# Altium PCB pay-ssm.PcbDoc (part 3 of 3)
Units mm, origin at the board's own origin, x right, y up, seen from the top; angles counter-clockwise.
Board outline 128 x 54 mm, 4 copper layers (Top Layer, GND, VCC, Bottom Layer), stack 0.778 mm thick; 199 components, 184 nets, 851 pads, 416 vias.
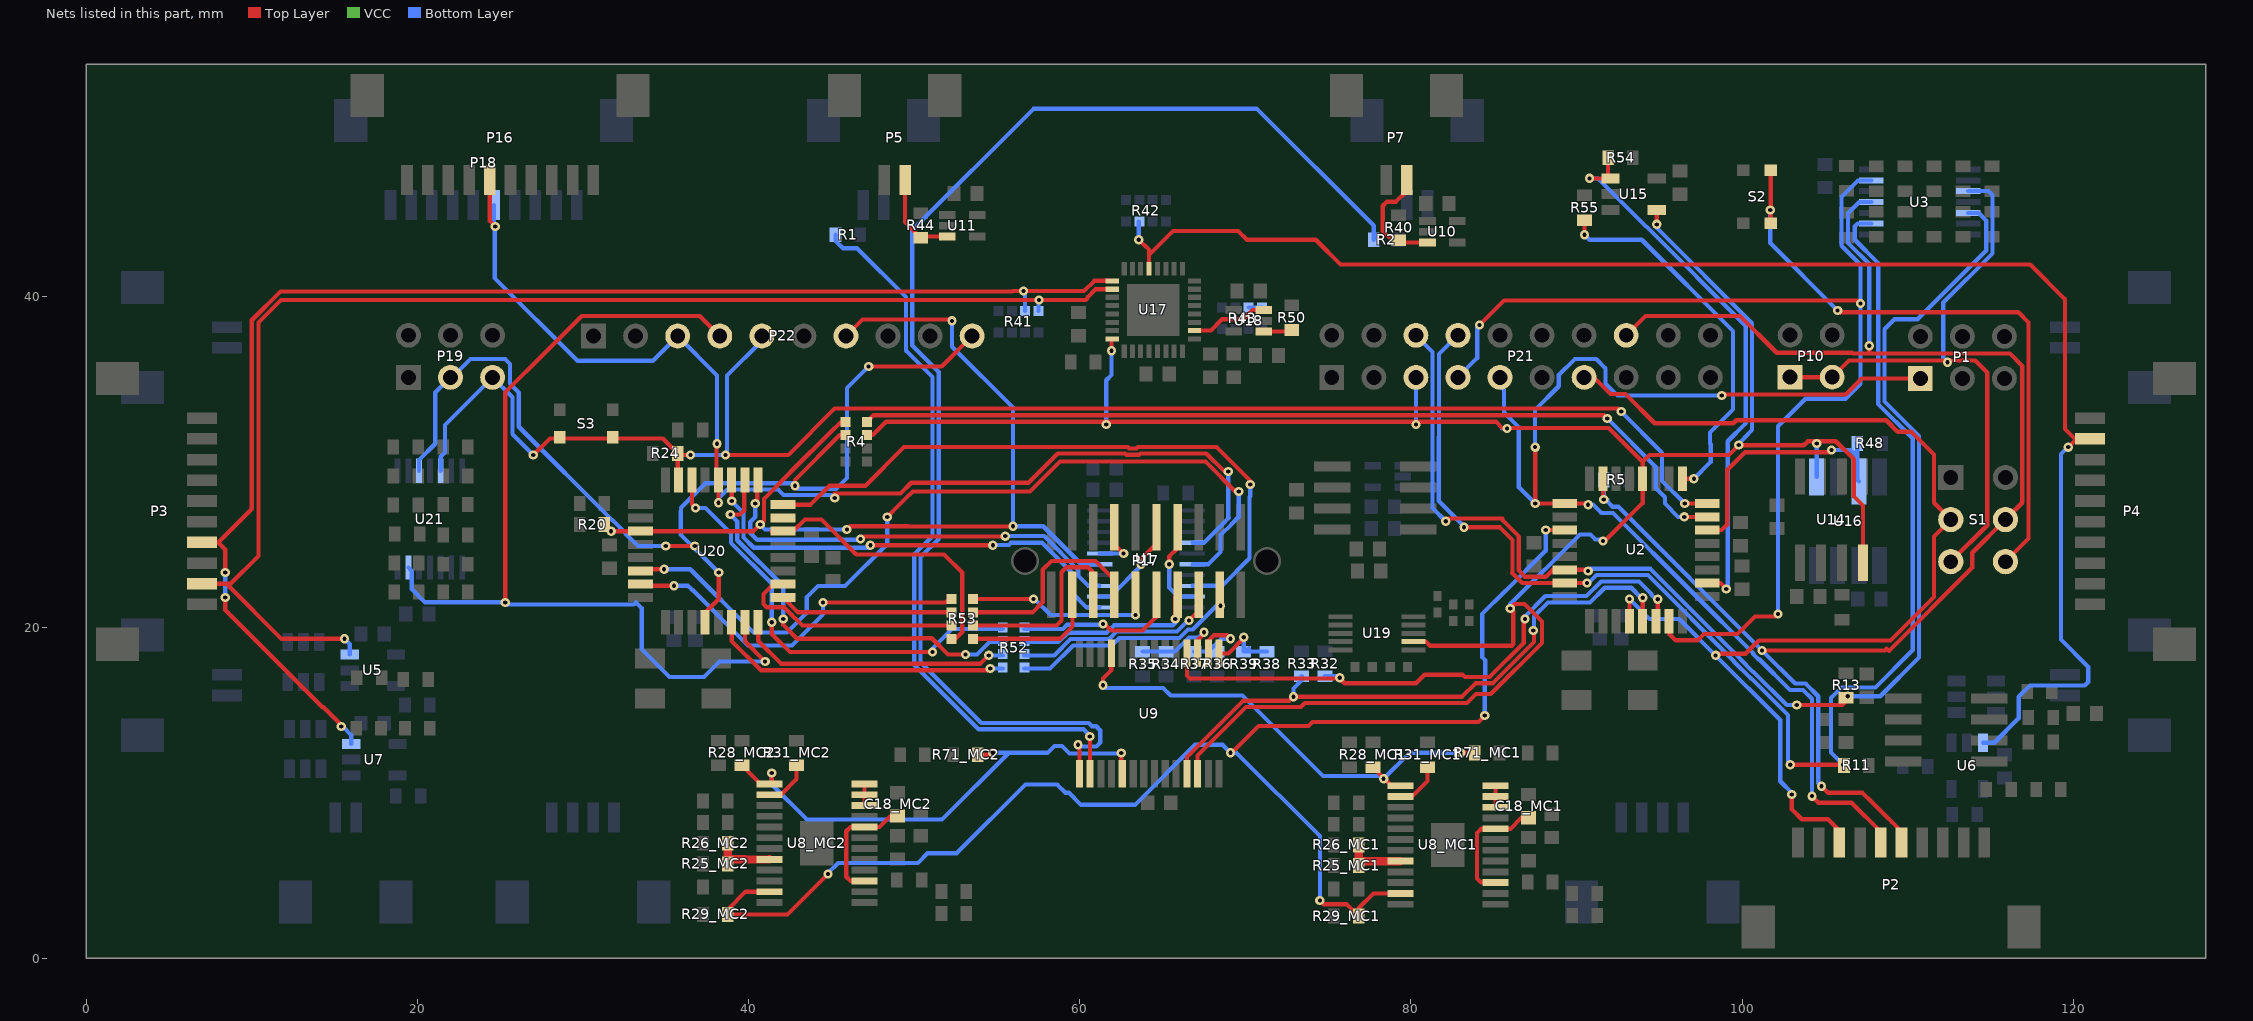
[diagram p5: the nets of this part, all layers, seen from the top]

## Via types
v1: diameter 0.559, hole 0.254, Top Layer to Bottom Layer, 376 vias
v2: diameter 1.5, hole 1.1, Top Layer to Bottom Layer, 32 vias
v3: diameter 6, hole 3.6, Top Layer to Bottom Layer, 8 vias

## Nets (pads, with @x,y where several pads share a name; then routed paths per layer and width w, separated by ;. In a path a pad name is that pad's centre, name@x,y a point inside that pad or via, vN(x,y) a via of type N, cw(c..) or ccw(c..) an arc to the next point about the centre after c; other vN are vias at no path point) (continued)
NetR25_MC1_2: R25_MC1.2 R26_MC1.2 U8_MC1.8 | length 4.5
  Top Layer w0.5: R26_MC1.2@76.85,6.85 76.847,6.825 R25_MC1.2@76.847,5.875 ; R25_MC1.2@76.847,5.875 76.85,5.875 77.894,5.875 ; R25_MC1.2@76.847,5.875 77.894,5.875 ; 77.894,5.875 77.9,5.869 U8_MC1.8@79.351,5.869 ; U8_MC1.8@79.351,5.869 U8_MC1.8@79.357,5.875 U8_MC1.8@79.351,5.869
NetR25_MC2_2: R25_MC2.2 R26_MC2.2 U8_MC2.8 | length 4.5
  Top Layer w0.5: R26_MC2.2@38.75,6.956 38.747,6.931 R25_MC2.2@38.747,5.981 ; U8_MC2.8@41.257,5.981 41.251,5.975 39.8,5.975 39.794,5.981 ; R25_MC2.2@38.747,5.981 38.75,5.981 39.794,5.981 ; R25_MC2.2@38.747,5.981 39.794,5.981
NetR31_MC1_2: R31_MC1.2 U8_MC1.2 | length 2.9
  Top Layer w0.254: U8_MC1.2@79.357,9.775 80.056,9.775 81,10.719 R31_MC1.2@81,11.55
NetR31_MC2_2: R31_MC2.2 U8_MC2.2 | length 2.9
  Top Layer w0.254: U8_MC2.2@41.257,9.881 41.956,9.881 42.9,10.825 R31_MC2.2@42.9,11.656
NetR34_2: R34.2 R35.2 U9.17 | length 5.6
  Top Layer w0.254: U9.17@67.114,18.418 67.114,19.214 67.5,19.6 v1(67.5,19.7)
  Bottom Layer w0.254: R35.2@63.8,18.525 R34.2@65.2,18.525 65.741,18.525 66.601,19.386 67.185,19.386 v1(67.5,19.7)
NetR36_2: R36.2 R37.2 U9.16 | length 4.9
  Top Layer w0.254: U9.16@67.774,18.418 67.774,19.184 68.106,19.515 68.885,19.515 v1(69.1,19.3)
  Bottom Layer w0.254: R37.2@66.9,18.525 67.8,18.525 67.774,18.551 68.524,19.3 v1(69.1,19.3)
NetR38_2: R38.2 R39.2 U9.15 | length 4.6
  Top Layer w0.254: U9.15@68.409,18.418 68.973,18.418 69.9,19.346 v1(69.9,19.4)
  Bottom Layer w0.254: v1(69.9,19.4) R39.2@69.9,18.525 ; R39.2@70.216,18.725 R39.2@69.9,18.525 ; R38.2@71.3,18.525 R39.2@69.9,18.525
NetR43_7: R43.7 R43.8 | length 0.8
  Bottom Layer w0.254: R43.7@70.2,39.3 R43.8@71,39.3
NetR50_1: R50.1 U18.1 | length 1.7
  Top Layer w0.254: U18.1@71.1,37.85 72.7,37.85 R50.1@72.8,37.95
NetS1_6: S1.6 S2.1 | length 37.8
  Top Layer w0.254: S2.1@101.725,44.4 S2.1@101.725,47.6 ; v1(105.767,39.133) 105.878,39.022 116.678,39.022 117.3,38.4 117.3,25.359 S1.6@115.901,23.96
  Bottom Layer w0.254: v1(101.7,45.2) 101.7,43.2 v1(105.767,39.133)
NetU8_MC1_22: U8_MC1.22 U8_MC1.23 U8_MC1.24 | length 1.3
  Top Layer w0.254: U8_MC1.22@85.097,9.125 U8_MC1.23@85.097,9.775 U8_MC1.24@85.097,10.425
NetU8_MC2_22: U8_MC2.22 U8_MC2.23 U8_MC2.24 | length 1.3
  Top Layer w0.254: U8_MC2.22@46.997,9.231 U8_MC2.23@46.997,9.881 U8_MC2.24@46.997,10.531
NetU17_2: U17.2 U18.3 | length 4.7
  Top Layer w0.254: U17.2@66.928,37.921 67.921,37.921 68.6,38.6 69.9,38.6 70.45,39.15 U18.3@71.1,39.15
PB2/INT1: R52.2 U20.16 | length 16.7
  Top Layer w0.254: U20.16@40.579,20.3 40.579,19.186 41.965,17.8 54,17.8 v1(54.5,18.3)
  Bottom Layer w0.254: v1(54.5,18.3) R52.2@55.35,18.3
PB3/PCINT3: U20.23
PB4: U1.8 U20.24 | length 39.4
  Top Layer w0.254: U20.24@42.079,27.4 43.735,27.4 44.878,28.543 47.06,28.543 49.392,30.875 62.894,30.875 62.979,30.79 63.421,30.79 63.506,30.875 68.252,30.875 70.3,28.827 v1(70.3,28.625)
  Bottom Layer w0.254: U1.8@66.8,22.5 68.585,22.5 70.25,24.165 70.25,27.863 70.3,27.913 v1(70.3,28.625)
PB5/INT2: R52.3 U20.26 | length 25.1
  Top Layer w0.254: v1(38.9,26.8) 39.484,26.8 39.734,27.05 39.734,28.855 U20.26@39.779,28.9 ; v1(42.1,20.5) 42.1,20.137 42.937,19.3 49.846,19.3 49.879,19.333 51.063,19.333 52.047,18.349 v1(53.1,18.349)
  Bottom Layer w0.254: v1(38.9,26.8) 39.319,26.381 39.319,25.254 42.1,22.473 v1(42.1,20.5) ; v1(53.1,18.349) 53.794,18.349 54.546,19.1 R52.3@55.35,19.1
PB6: U1.11 U20.27 | length 27.9
  Top Layer w0.254: v1(38.979,27.625) U20.27@38.979,28.9 ; v1(47.354,24.954) v1(54.752,24.954)
  Bottom Layer w0.254: v1(38.979,27.625) 39.7,26.904 39.7,25.412 40.31,24.802 v1@47.3,24.802 ; v1@47.3,24.9 v1(47.354,24.954) ; v1(54.752,24.954) 54.765,24.967 55.721,24.967 55.854,25.1 57.715,25.1 59.544,23.271 59.544,22.056 60.4,21.2 U1.11@61.2,21.2
PC0/INT3: R52.4 U20.30 | length 26.8
  Top Layer w0.254: U20.30@36.579,28.9 36.579,27.421 v1(36.8,27.2) ; v1(41.4,20.3) 41.4,19.6 42.5,18.5 v1(51.1,18.5)
  Bottom Layer w0.254: v1(36.8,27.2) 37.4,27.2 38.938,25.662 38.938,25.096 41.4,22.634 v1(41.4,20.3) ; v1(51.1,18.5) 51.1,18.712 52.288,19.9 R52.4@55.35,19.9
PC2: U1.6 U20.6 | length 50.4
  Top Layer w0.254: U20.6@33.479,23.4 33.579,23.5 v1(34.9,23.5) ; v1(48.376,26.656) 48.567,26.847 48.567,26.855 48.719,27.008 48.719,27.016 49.684,27.981 49.701,27.981 49.92,28.2 57,28.2 58.8,30 67.593,30 69.393,28.2 v1(69.6,28.2)
  Bottom Layer w0.254: v1(34.9,23.5) 36.479,23.5 40.3,19.679 42.32,19.679 43.519,20.878 43.519,21.815 44.185,22.481 45.831,22.481 48.376,25.026 v1(48.376,26.656) ; U1.6@66.8,23.8 67.761,23.8 67.765,23.804 67.765,23.812 68.5,24.547 68.5,25.561 69.183,26.244 69.183,26.252 69.6,26.668 v1(69.6,28.2)
PC3: R53.1 U20.7 | length 21.9
  Top Layer w0.254: U20.7@33.479,22.6 33.579,22.5 v1(35.5,22.5) ; v1(44.497,21.5) 51.9,21.5 R53.1@52.2,21.8
  Bottom Layer w0.254: v1(35.5,22.5) 36.334,22.5 36.401,22.433 36.421,22.433 36.62,22.234 36.634,22.234 39.968,18.9 42.619,18.9 44.497,20.778 v1(44.497,21.5)
PC4: R53.2 U20.17 | length 10.5
  Top Layer w0.254: U20.17@42.079,21.8 42.093,21.8 42.993,20.9 R53.2@52.25,20.9
PC5: R53.3 U20.18 | length 13.9
  Top Layer w0.254: U20.18@42.079,22.6 41.495,22.6 40.9,22.005 40.9,21.4 41.1,21.2 42.154,21.2 42.633,20.721 42.633,20.707 42.821,20.519 42.841,20.519 43.26,20.1 R53.3@52.25,20.1
PC6: R53.4 U20.22 | length 17.5
  Top Layer w0.254: U20.22@41.4,25.8 U20.22@42.079,25.8 42.7,25.8 43.4,26.5 44.4,26.5 46.5,24.4 51.81,24.4 52.9,23.31 52.9,19.7 52.5,19.3 R53.4@52.25,19.3
PC7: U1.13 U20.25 | length 26.2
  Top Layer w0.254: v1(40.4,27.465) 40.519,27.584 40.519,28.84 U20.25@40.579,28.9 ; v1(46.765,25.335) 46.917,25.487 55.487,25.487 v1(55.5,25.5)
  Bottom Layer w0.254: v1(40.4,27.465) 40.4,26.654 40.1,26.354 40.1,25.7 40.519,25.281 46.711,25.281 v1(46.765,25.335) ; v1(55.5,25.5) 57.853,25.5 59.925,23.428 59.925,23.1 60.525,22.5 U1.13@61.2,22.5
PD6/INT0: R52.1 U20.14 | length 18.3
  Top Layer w0.254: U20.14@38.979,20.3 38.979,19.173 40.752,17.4 54.5,17.4 v1(54.6,17.5)
  Bottom Layer w0.254: v1(54.6,17.5) R52.1@55.35,17.5
PEX_C\S\: R33.1 U2.13 U9.11 | length 36.9
  Top Layer w0.254: U9.11@66.479,11.154 66.479,12.164 69.879,15.564 72.669,15.564 v1(72.9,15.795) 72.91,15.805 83.093,15.805 83.9,16.613 84.934,16.613 87.434,19.113 87.434,19.746 v1(87.38,19.8) ; U2.13@93.993,20.365 94.002,20.374 v1(94.002,21.781)
  Bottom Layer w0.254: v1(72.9,15.795) 72.9,16.3 73.4,16.8 R33.1@73.4,17.05 ; v1(87.38,19.8) 87.433,19.854 87.433,20.665 88.268,21.5 90.817,21.5 91.7,22.383 93.302,22.383 93.904,21.781 v1(94.002,21.781)
PEX_R\S\T\: R32.1 U2.14 U9.18 | length 36.7
  Top Layer w0.254: U9.18@66.479,18.418 66.479,17.093 66.689,16.883 66.706,16.9 75.651,16.9 v1(75.701,16.95) 75.701,16.921 76.003,16.619 80.298,16.619 80.812,17.133 83.121,17.133 83.261,16.994 84.753,16.994 86.814,19.055 86.814,20.651 86.886,20.58 v1(86.886,20.5) ; U2.14@94.793,20.365 94.9,20.472 v1(94.9,21.685)
  Bottom Layer w0.254: R32.1@74.8,17.05 75.601,17.05 v1(75.701,16.95) ; v1(86.886,20.5) 86.886,20.656 88.111,21.881 90.606,21.881 91.489,22.764 93.773,22.764 94.535,22.002 94.535,21.942 94.793,21.685 v1(94.9,21.685)
POS_LED_1: R1.1 U9.2 | length 44.3
  Top Layer w0.254: v1(60.6,13.4) 60.6,13.537 60.612,13.549 U9.2@60.612,11.154
  Bottom Layer w0.254: R1.1@45.25,43.7 45.25,43.334 45.7,42.884 46.555,42.884 49.5,39.939 49.5,36.7 51.1,35.1 51.1,25.496 50,24.396 50,17.73 53.895,13.835 60.227,13.835 60.6,13.463 v1(60.6,13.4)
POS_LED_2: R2.1 U9.1 | length 78.9
  Top Layer w0.254: v1(59.9,12.9) 59.9,12.997 59.977,13.073 U9.1@59.977,11.154
  Bottom Layer w0.254: v1(59.9,12.9) 59.9,12.983 60.083,12.8 61,12.8 61.238,13.038 61.238,13.774 60.993,14.019 60.742,14.019 60.545,14.216 54.053,14.216 50.381,17.888 50.381,24.238 51.481,25.338 51.481,35.419 49.881,37.019 49.881,43.981 57.206,51.306 70.694,51.306 77.75,44.25 R2.1@77.75,43.4
POS_PHT_1: P5.2 R44.1 U11.3 | length 5.2
  Top Layer w0.254: P5.2@49.45,47 49.45,44.461 R44.1@50.4,43.511 ; R44.1@50.679,43.6 U11.3@52,43.6
POS_PHT_2: P7.2 R40.2 U10.3 | length 6.8
  Top Layer w0.254: R40.2@79.256,43.378 78.855,43.378 78.3,43.933 78.3,45.45 78.55,45.7 79.1,45.7 79.75,46.35 P7.2@79.75,47 ; R40.2@79.406,43.228 U10.3@81,43.228
PR_C\S\: R48.2 U2.22 U16.3 | length 15.5
  Top Layer w0.254: U2.22@97.893,25.865 98.765,25.865 99.1,26.2 99.1,29.5 100.167,30.567 105.267,30.567 v1(105.4,30.7)
  Bottom Layer w0.254: v1(105.4,30.7) 106.55,30.7 106.95,30.3 ; R48.2@106.95,31.1 106.95,30.3 ; U16.3@107.05,28.8 106.95,28.9 106.95,30.3
R\S\T\: P2.5 P21.16 R5.1 S1.5 U2.31 U3.11 | length 97.2
  Top Layer w0.254: U2.31@91.593,28.965 91.593,27.757 v1(91.643,27.707) ; P21.16@93,37.629 94.171,38.8 99.865,38.8 102,36.665 102.089,36.576 106.641,36.576 106.684,36.533 107.65,36.533 ; v1(101.2,18.6) 108.622,18.6 108.722,18.7 108.861,18.561 113.899,23.599 113.899,24.498 S1.5@115.901,26.5 116.917,27.516 116.917,35.783 116.167,36.533 107.65,36.533 ; v1(104.8,10.4) 105.2,10 107.275,10 107.875,9.4 108.688,8.587 109.069,8.206 109.625,7.65 P2.5@109.625,7 ; v1(107.681,37) 107.681,36.564 107.65,36.533
  Bottom Layer w0.254: R5.1@91.643,28.9 v1(91.643,27.707) 91.859,27.707 91.859,27.587 92.172,27.274 92.526,27.274 v1(101.2,18.6) ; v1@101.261,18.6 101.3,18.561 101.3,18.5 103.205,16.595 103.837,16.595 104.6,15.832 104.6,10.6 v1(104.8,10.4) ; v1(107.681,37) 107.681,41.919 106.4,43.2 106.4,45 107.075,45.675 U3.11@107.808,45.675
R\S\T\_OPTICAL: P19.5 P22.5 R24.1 S3.1 U2.24 U20.31 U21.5 | length 98.7
  Top Layer w0.254: v1(27,30.394) 28.006,31.4 34.82,31.4 R24.1@35.72,30.5 ; U20.31@35.779,28.9 35.72,28.959 R24.1@35.72,30.5 ; v1(36.5,30.4) 35.82,30.4 R24.1@35.72,30.5 ; v1(38.6,30.4) 42.4,30.4 45.2,33.2 92.52,33.2 v1(92.7,33.02) ; v1(96.535,27.465) U2.24@97.893,27.465
  Bottom Layer w0.254: U21.5@21.41,29.446 21.41,30.31 21.662,30.562 21.662,32.211 P19.5@24.54,35.089 25.738,33.891 25.738,31.656 v1(27,30.394) ; v1(36.5,30.4) v1(38.6,30.4) 38.7,30.5 38.7,35.2 40.8,37.3 P22.5@40.8,37.588 ; v1(92.7,33.02) 92.68,33.02 95.162,30.538 95.162,28.838 v1(96.535,27.465)
RXCAN: P21.8 R11.2 U2.7 U3.9 | length 83.3
  Top Layer w0.254: v1(83.2,26.032) 85.371,26.032 86.133,25.269 86.133,23.281 86.119,23.267 86.721,22.665 U2.7@89.293,22.665 v1(90.635,22.665) ; v1(102.9,11.7) R11.2@105.994,11.7
  Bottom Layer w0.254: P21.8@82.84,37.629 82.829,37.629 81.7,36.5 81.7,31.5 81.681,31.481 81.681,27.619 83.2,26.1 v1(83.2,26.032) ; v1(90.635,22.665) 90.719,22.665 91.2,23.145 94.309,23.145 99.523,17.931 99.523,17.906 100.505,16.924 100.531,16.924 102.767,14.688 102.767,11.833 v1(102.9,11.7) ; v1(106.1,11.7) 105.362,12.438 105.362,15.737 105.992,16.367 108.048,16.367 110.3,18.619 110.3,31.392 108.214,33.478 108.214,41.986 106.8,43.4 106.8,44.2 106.979,44.379 U3.9@107.808,44.379
RXLIN: P10.1 P10.3 S1.3 U3.3 | length 37.7
  Top Layer w0.254: P10.1@102.9,35.1 P10.3@105.44,35.1 106.447,36.107 112.121,36.107 ; v1@112.4,36.107 114.08,36.107 114.8,35.386 114.8,26.161 S1.3@112.599,23.96
  Bottom Layer w0.254: v1(112.4,36) 112.145,36.255 112.145,39.606 115.118,42.579 115.118,46.101 114.884,46.335 U3.3@113.65,46.335
RXLIN_OPTICAL: P19.3 P22.10 R4.6 U20.12 U21.3 | length 66.3
  Top Layer w0.254: v1(35,24.9) v1(36.748,24.9) ; U20.12@37.379,20.3 37.4,20.321 37.398,20.323 37.398,20.903 38.2,21.705 v1(38.2,23.3) ; v1(42.8,28.543) 42.8,28.894 45.506,31.6 R4.6@45.85,31.6 ; v1(47.25,35.75) 51.662,35.75 P22.10@53.5,37.588
  Bottom Layer w0.254: U21.3@20.09,29.446 20.09,30.09 21.081,31.081 21.081,34.17 P19.3@22,35.089 22.089,35.089 23.2,36.2 25.3,36.2 25.6,35.9 25.6,34.7 26.119,34.181 26.119,32.103 31.782,26.44 31.815,26.44 32.578,25.676 32.578,25.644 33.322,24.9 v1(35,24.9) ; v1(38.2,23.3) 35.9,25.6 35.9,26.982 35.914,26.996 35.914,27.212 37.398,28.695 42.648,28.695 v1(42.8,28.543) 42.976,28.367 45.299,28.367 45.935,29.003 45.935,34.435 v1(47.25,35.75)
S\L\P\_A: R28_MC1.2 R71_MC1.2 U8_MC1.1 U9.25 | length 29.7
  Top Layer w0.254: v1(61.4,16.5) 61.4,16.9 61.907,17.407 U9.25@61.907,18.418 ; R28_MC1.2@77.7,11.55 78.375,10.875 v1@78.4,10.85 ; v1(78.35,10.85) v1@78.4,10.85 ; U8_MC1.1@79.357,10.425 78.825,10.425 v1@78.4,10.85 ; v1(83,12.415) R71_MC1.2@83.85,12.415
  Bottom Layer w0.254: v1(61.4,16.5) 61.567,16.333 65.036,16.333 65.495,15.875 69.825,15.875 74.69,11.01 78.19,11.01 v1(78.35,10.85) 79.915,12.415 v1(83,12.415)
S\L\P\_B: R28_MC2.2 R71_MC2.2 U8_MC2.1 U9.5 | length 30.8
  Top Layer w0.254: R28_MC2.2@39.6,11.656 40.725,10.531 U8_MC2.1@41.257,10.531 41.4,10.674 v1(41.4,11.2) ; R71_MC2.2@53.85,12.3 54.626,12.3 v1(54.741,12.415) ; v1(62.5,12.4) 62.5,11.222 U9.5@62.567,11.154
  Bottom Layer w0.254: v1(41.4,11.2) 41.4,10.5 43.519,8.381 51.681,8.381 55.715,12.415 ; v1(54.741,12.415) 55.715,12.415 ; v1(62.5,12.4) 62.466,12.367 59.388,12.367 58.921,12.833 58.479,12.833 58.06,12.415 55.715,12.415
SCK: P21.5 R4.3 U2.28 U9.12 U14.4 U15.4 U16.1 U17.24 U19.7 | length 147.1
  Top Layer w0.254: R4.3@47.15,31.6 47.5,31.6 48.314,32.414 v1@61.6,32.414 ; v1(61.6,32.245) v1@61.6,32.414 ; v1(61.91,36.7) 61.91,37.373 U17.24@61.95,37.413 ; U9.12@67.114,11.154 67.114,12.261 70.037,15.183 73.347,15.183 73.588,15.424 83.388,15.424 83.924,15.961 84.821,15.961 87.913,19.053 87.913,20.021 87.919,20.027 87.919,20.338 86.857,21.4 86.268,21.4 v1(86,21.132) 86.182,20.95 86.182,18.997 86.2,18.979 86.103,18.882 81.15,18.882 80.9,19.132 U19.7@80.15,19.132 ; v1(80.3,32.245) v1@80.3,32.414 ; v1(85.8,32) v1@86.033,32 ; v1(91.6,25.2) 91.7,25.2 93.993,27.493 U2.28@93.993,28.965 93.993,29.993 ; v1(94.848,44.328) U15.4@94.848,45.206 ; v1(104.5,31.1) v1@104.633,31.233 ; U14.4@107.299,23.9 107.299,27.341 106.745,27.895 106.745,30.143 105.655,31.233 v1@104.633,31.233 ; v1@61.6,32.414 v1@80.3,32.414 ; v1@80.3,32.414 85.131,32.414 85.508,32.038 91.947,32.038 93.993,29.993 ; 93.993,29.993 94.4,30.4 99.2,30.4 v1(99.8,31) 99.814,30.986 103.719,30.986 103.967,31.233 v1@104.633,31.233
  Bottom Layer w0.254: v1(61.6,32.245) 61.6,34.915 61.91,35.225 v1(61.91,36.7) ; v1(80.3,32.245) P21.5@80.3,35.089 ; 85.497,32 v1(85.8,32) ; v1(86,21.132) 86,21.4 90.198,25.598 90.834,25.598 91.136,25.296 91.6,25.296 v1(91.6,25.2) ; v1(94.848,44.328) 94.848,44.105 100.6,38.353 100.6,32.224 100.594,32.218 100.594,31.914 100.381,31.701 100.381,31.681 99.8,31.1 v1(99.8,31) ; U16.1@104.5,29.075 v1(104.5,31.1)
SCK_32M1: P16.5 P18.5 P22.3 U1.4 U20.28 | length 71.2
  Top Layer w0.254: P16.5@24.375,47 24.375,44.525 v1(24.7,44.2) ; v1(38.1,31.081) 38.067,31.048 38.067,29.012 U20.28@38.179,28.9 v1(38.179,27.521) ; v1(45.2,27.8) 45.2,28.06 45.18,28.08 49.182,28.08 49.823,28.721 56.896,28.721 58.669,30.494 62.737,30.494 62.821,30.409 63.579,30.409 63.663,30.494 67.638,30.494 68.732,29.4 v1(68.973,29.4)
  Bottom Layer w0.254: P18.5@24.625,45.5 24.625,44.275 v1(24.7,44.2) 24.667,44.167 24.667,41.095 29.67,36.091 34.224,36.091 P22.3@35.72,37.588 35.72,37.58 38.1,35.2 v1(38.1,31.081) ; v1(38.179,27.521) 38.179,27.779 38.714,28.314 41.786,28.314 42.114,27.986 45.086,27.986 45.2,27.871 v1(45.2,27.8) ; U1.4@66.8,25.1 66.802,25.102 67.502,25.102 68.802,26.402 68.802,26.409 69,26.607 68.973,26.634 v1(68.973,29.4)
SCK_A: P2.8 P21.13 S1.2 U2.12 | length 70.6
  Top Layer w0.254: P21.13@90.46,35.089 91.046,35.089 92.05,34.085 92.954,34.085 94.721,32.318 99.46,32.318 99.642,32.5 108.7,32.5 109.4,31.8 110.217,31.8 111.583,30.434 111.583,27.516 S1.2@112.599,26.5 111.583,25.484 111.583,21.822 108.961,19.2 101,19.2 100.2,18.4 98.4,18.4 v1(98.4,18.3) ; U2.12@93.193,20.365 93.193,21.692 v1(93.2,21.7) ; v1(103,9.9) 103,9 103.6,8.4 105.181,8.4 105.875,7.706 P2.8@105.875,7
  Bottom Layer w0.254: v1(93.2,21.7) 94.4,20.5 96.2,20.5 v1(98.4,18.3) 102.3,14.4 102.3,10.7 103,10 v1(103,9.9)
SCK_IN: P17.7 U1.16 | length 3.3
  Top Layer w0.254: P17.7@62.095,26.032 62.095,25.005 v1(62.65,24.45)
  Bottom Layer w0.254: U1.16@61.2,24.45 v1(62.65,24.45)
SD1_C\S\: P17.10 R53.8 | length 11.5
  Top Layer w0.254: R53.8@53.55,21.7 56.55,21.7 v1(57.2,21.7) ; v1(63.365,20.732) P17.10@63.365,21.968
  Bottom Layer w0.254: v1(57.2,21.7) 57.277,21.7 58.245,20.732 61.177,20.732 61.179,20.733 61.621,20.733 61.623,20.732 v1(63.365,20.732)
SD2_C\S\: P17.8 R53.7 | length 12.3
  Top Layer w0.254: R53.7@53.55,20.9 56.55,20.9 57.154,20.9 57.767,21.512 57.767,23.475 58.292,24 60.95,24 62.095,22.855 P17.8@62.095,21.968
SD3_C\S\: P17.6 R53.6 | length 11.9
  Top Layer w0.254: R53.6@53.55,20.1 58.6,20.1 58.9,20.4 58.9,23.323 59.196,23.619 60.5,23.619 60.825,23.294 P17.6@60.825,21.968
SD4_C\S\: P17.4 R53.5 | length 8.2
  Top Layer w0.254: R53.5@53.55,19.3 56.55,19.3 58.8,19.3 59.555,20.055 P17.4@59.555,21.968
SENS_ADC_C\S\: P17.13 U1.9 | length 5.5
  Top Layer w0.254: v1(65.4,23.8) 65.4,24.265 65.905,24.77 P17.13@65.905,26.032
  Bottom Layer w0.254: v1(65.4,23.8) 65.4,22.4 65.95,21.85 U1.9@66.8,21.85
SENS_C\S\: R4.4 U2.23 | length 54.4
  Top Layer w0.254: R4.4@47.15,32.4 47.55,32.8 91.659,32.8 v1(91.859,32.6) ; v1(96.5,26.665) U2.23@97.893,26.665
  Bottom Layer w0.254: v1(91.859,32.6) 94.781,29.678 94.781,28.398 95.333,27.846 95.333,27.467 96.135,26.665 v1(96.5,26.665)
SENS_CLK: P22.7 R4.5 R20.1 U1.15 U20.3 | length 60.7
  Top Layer w0.254: R20.1@31.296,26.2 31.696,25.8 v1(31.7,25.8) U20.3@33.479,25.8 40.3,25.8 v1(40.7,26.2) 40.933,26.433 40.933,27.752 42.519,29.338 42.519,29.358 45.142,31.981 45.162,31.981 45.581,32.4 R4.5@45.85,32.4 ; P22.7@45.88,37.588 46.884,38.592 52.196,38.592 v1(52.288,38.5) ; v1(45.935,25.9) 46.135,26.1 49.656,26.1 49.679,26.077 55.939,26.077 v1(55.962,26.1)
  Bottom Layer w0.254: v1(40.7,26.2) 41,25.9 v1(45.935,25.9) ; v1(52.288,38.5) 52.288,36.934 55.962,33.26 v1(55.962,26.1) 57.792,26.1 60.092,23.8 U1.15@61.2,23.8
SENS_DAC_C\S\: P17.11 U1.12 | length 6.1
  Top Layer w0.254: v1(63.7,23.8) 63.7,24.108 64.635,25.043 P17.11@64.635,26.032
  Bottom Layer w0.254: U1.12@61.2,21.85 61.85,21.85 63.8,23.8 v1(63.7,23.8)
SENS_MISO_A: P1.1 P2.6 P21.9 U2.1 | length 74.6
  Top Layer w0.254: P21.9@85.268,34.978 P21.9@85.38,35.089 ; v1@87.505,30.875 v1(87.505,27.465) U2.1@89.293,27.465 v1@90.7,27.465 ; v1(90.7,27.4) v1@90.7,27.465 ; v1(98.765,33.994) 98.765,34.055 106.255,34.055 107.225,35.025 P1.1@110.76,35.025 ; v1(104.219,9.8) 104.6,9.419 104.6,9.4 106.6,9.4 108.375,7.625 P2.6@108.375,7 ; v1@90.7,27.465 90.765,27.465 90.73,27.5 90.7,27.47 v1@90.7,27.465
  Bottom Layer w0.254: P21.9@85.38,35.089 85.38,34.58 85.619,34.341 85.619,32.981 86.505,32.095 86.505,32.063 86.514,32.054 86.514,28.456 v1(87.505,27.465) ; v1(87.5,30.875) 87.5,33.125 88.924,34.549 88.924,35.224 89.9,36.2 91.189,36.2 91.756,35.634 91.756,34.703 92.465,33.994 v1(98.765,33.994) ; v1(90.7,27.4) 90.989,27.4 91.496,26.893 92.207,26.893 96.96,22.14 100.666,18.434 100.666,18.379 100.979,18.067 101.033,18.067 102.886,16.214 103.679,16.214 104.214,15.679 104.214,15.673 104.219,15.669 v1(104.219,9.8)
STATUS: P21.7 U2.15 U3.13 | length 66.7
  Top Layer w0.254: v1(84.147,38.247) 85.631,39.731 106.972,39.731 v1(107.148,39.555) ; U2.15@95.593,20.365 95.593,19.607 95.993,19.207 97.314,19.207 97.702,19.595 99.718,19.595 100.77,20.648 v1@102,20.648
  Bottom Layer w0.254: P21.7@82.84,35.089 84,36.249 84,38.1 v1(84.147,38.247) ; v1(102.165,20.8) 102.165,32.135 103.831,33.8 106.25,33.8 107.148,34.698 v1(107.148,39.555) 107.148,41.888 106,43.036 106,45.981 106.989,46.97 U3.13@107.808,46.97
STATUS_32M1: P22.4 U20.15 U21.13 | length 57.8
  Top Layer w0.254: v1(25.3,21.5) 25.3,34.176 27.762,36.638 29.924,38.8 37.048,38.8 P22.4@38.26,37.588 ; U20.15@39.779,20.3 39.779,19.154 v1(41,17.933)
  Bottom Layer w0.254: U21.13@19.455,23.604 19.658,23.401 19.658,22.307 20.461,21.504 25.296,21.504 v1(25.3,21.5) 25.427,21.373 33.067,21.373 33.197,21.503 33.544,21.156 33.544,18.684 35.228,17 37.314,17 38.247,17.933 v1(41,17.933)
STEP: R29_MC1.2 R29_MC2.2 U2.3 U8_MC1.11 U8_MC2.11 | length 88.4
  Top Layer w0.254: U8_MC2.11@41.257,4.031 39.825,4.031 38.75,2.956 R29_MC2.2@38.75,2.657 42.357,2.657 v1(44.8,5.1) ; v1(69.1,12.415) 69.135,12.38 70.789,14.033 73.814,14.033 74.061,14.281 84.076,14.281 v1(84.461,14.665) ; v1(74.5,3.5) 74.725,3.275 76.1,3.275 76.85,2.525 R29_MC1.2@76.85,2.551 76.85,3.038 77.737,3.925 77.925,3.925 ; v1(88.135,25.865) U2.3@89.293,25.865 U2.3@89.257,25.9 ; 77.925,3.925 U8_MC1.11@79.357,3.925 77.925,3.925
  Bottom Layer w0.254: v1(44.8,5.1) 44.8,5.15 45.417,5.767 50.221,5.767 50.804,6.35 52.566,6.35 56.726,10.51 58.636,10.51 59.142,10.004 59.348,10.004 60.078,9.274 63.34,9.274 66.967,12.9 68.615,12.9 v1(69.1,12.415) 69.469,12.415 74.5,7.384 v1(74.5,3.5) ; v1(84.461,14.665) 84.461,16.906 84.481,16.927 84.481,18.011 84.3,18.192 84.3,20.79 85.724,22.214 85.729,22.214 88.135,24.621 v1(88.135,25.865)
SYNCO1: P17.18 R52.8 | length 14.1
  Top Layer w0.254: P17.18@68.445,21.968 68.5,21.913 v1(68.5,21.3)
  Bottom Layer w0.254: R52.8@56.65,17.5 58.2,17.5 59.605,18.905 61.936,18.905 62.384,19.352 66.029,19.352 66.544,19.867 66.821,19.867 67.133,20.179 67.133,20.182 68.252,21.3 v1(68.5,21.3)
SYNCO2: P17.16 R52.7 | length 12.6
  Top Layer w0.254: v1(66.6,20.4) 67.175,20.975 P17.16@67.175,21.968
  Bottom Layer w0.254: R52.7@56.65,18.3 58.461,18.3 59.447,19.286 61.779,19.286 62.226,19.733 65.872,19.733 66.538,20.4 v1(66.6,20.4)
SYNCO3: P17.14 R52.6 | length 11.4
  Top Layer w0.254: v1(65.767,20.5) 65.767,21.83 P17.14@65.905,21.968
  Bottom Layer w0.254: R52.6@56.65,19.1 58.722,19.1 59.289,19.667 61.621,19.667 62.069,20.114 65.633,20.114 65.767,20.248 v1(65.767,20.5)
SYNCO4: P17.12 R52.5 | length 10.2
  Top Layer w0.254: v1(61.4,20.2) 61.5,20.2 61.9,19.8 63.798,19.8 64.635,20.637 P17.12@64.635,21.968
  Bottom Layer w0.254: R52.5@56.65,19.9 58.984,19.9 59.231,20.148 61.374,20.148 61.4,20.174 61.4,20.3 v1(61.4,20.2)
THM_1: P3.2 R41.8 U5.3 U17.18 | length 80.8
  Top Layer w0.254: P3.2@7,22.625 8.475,22.625 ; v1(15.6,19.3) 11.8,19.3 8.475,22.625 ; U17.18@61.95,40.41 60.956,40.41 60.467,39.921 60.467,39.867 60.365,39.765 v1(57.531,39.765) 11.765,39.765 10.4,38.4 10.4,24.3 8.725,22.625 8.475,22.625
  Bottom Layer w0.254: v1(15.6,19.3) 15.916,18.984 U5.3@15.916,18.349 ; R41.8@57.5,39.1 v1@57.5,39.734
THM_2: P4.2 R42.7 U6.3 U17.13 | length 94.8
  Top Layer w0.254: v1(63.561,43.4) 64.185,42.815 64.185,42.485 ; U17.13@64.185,41.655 64.185,42.485 ; v1(119.7,30.875) P4.2@120.2,31.375 ; P4.2@121,31.375 P4.2@120.2,31.375 ; 64.185,42.485 65.633,43.933 69.567,43.933 70.1,43.4 74.25,43.4 75.75,41.9 117.4,41.9 119.5,39.8 119.5,31.975 120.1,31.375 P4.2@120.2,31.375
  Bottom Layer w0.254: v1(63.561,43.4) R42.7@63.561,44.5 ; U6.3@114.538,13.025 115.225,13.025 116.7,14.5 116.7,15.8 117.379,16.479 120.687,16.479 120.9,16.692 120.9,17.6 119.25,19.25 119.25,30.45 119.7,30.9 v1(119.7,30.875)
THM_3: P3.4 R41.7 U7.3 U17.17 | length 83.9
  Top Layer w0.254: v1(8.4,21.8) 8.4,21.046 14.279,15.167 14.333,15.167 15.4,14.1 v1(15.4,14) ; v1(8.4,23.3) 8.4,24.7 7.975,25.125 10,27.15 10,38.539 11.728,40.267 55.921,40.267 55.953,40.299 v1(56.6,40.299) 60.261,40.299 60.881,40.918 U17.17@61.95,40.918
  Bottom Layer w0.254: v1(8.4,21.8) v1(8.4,23.3) ; v1(15.4,14) 15.5,14 16,13.5 U7.3@16,12.95 ; R41.7@56.7,39.1 v1@56.7,40.199
THM_DIS: R55.1 U2.25 | length 22.9
  Top Layer w0.254: v1(90.481,43.7) R55.1@90.481,44.574 ; U2.25@96.393,28.965 v1(97.085,28.965)
  Bottom Layer w0.254: v1(90.481,43.7) 90.781,43.4 93.937,43.4 99.457,37.88 99.457,33.157 98.067,31.767 98.067,31.079 98.1,31.046 98.1,29.98 v1(97.085,28.965)
TM_C\S\: R54.1 U2.18 U15.1 | length 33.4
  Top Layer w0.254: v1(90.787,47.106) U15.1@92.048,47.106 91.906,47.248 R54.1@91.906,48.349 ; U2.18@97.853,22.625 U2.18@97.893,22.665 98.692,22.665 v1(99.044,22.314)
  Bottom Layer w0.254: v1(90.787,47.106) 91.289,47.106 94.234,44.162 94.252,44.162 100.219,38.195 100.219,32.381 100.213,32.375 100.213,32.313 99.133,31.233 99.133,22.403 v1(99.044,22.314)
TXCAN: P21.6 R13.2 U2.6 U3.5 | length 80.3
  Top Layer w0.254: v1(82.1,26.4) 82.265,26.565 85.52,26.565 85.52,26.464 86.514,25.47 86.514,23.424 86.73,23.209 86.73,23.195 86.879,23.046 86.893,23.046 88.146,23.046 88.565,23.465 U2.6@89.293,23.465 90.635,23.465 v1(90.7,23.4) ; v1(103.3,15.3) 106.046,15.3 106.377,15.631 R13.2@106.277,15.731 v1(106.379,15.833)
  Bottom Layer w0.254: P21.6@80.3,37.629 81.304,36.625 81.304,34.669 81.3,34.665 81.3,27.2 v1(82.1,26.4) ; v1(90.7,23.4) 90.826,23.526 94.467,23.526 99.904,18.089 99.904,18.063 100.663,17.305 100.689,17.305 102.693,15.3 v1(103.3,15.3) ; v1(106.379,15.833) 108.338,15.833 110.681,18.176 110.681,31.55 108.595,33.636 108.595,37.995 109.2,38.6 110.6,38.6 114.737,42.737 114.737,44.566 114.289,45.014 U3.5@113.65,45.014
VINT_MC1: C18_MC1.2 U8_MC1.15 U8_MC1.20 | length 7.4
  Top Layer w0.254: U8_MC1.15@85.097,4.575 84.247,4.575 83.997,4.825 83.997,7.575 84.247,7.825 U8_MC1.20@85.097,7.825 86.006,7.825 86.681,8.5 C18_MC1.2@87.1,8.5
VINT_MC2: C18_MC2.2 U8_MC2.15 U8_MC2.20 | length 7.4
  Top Layer w0.254: U8_MC2.15@46.997,4.681 46.147,4.681 45.897,4.931 45.897,7.681 46.147,7.931 U8_MC2.20@46.997,7.931 47.906,7.931 48.581,8.606 C18_MC2.2@49,8.606
pads on no net: P2. P2.10 P3. P4. P5. P6. P7. P8. P11. P12. P13. P14. P15. P16. P16_MC1. P16_MC2. P17.21 P17.22 P18. P21.10 U13.1 U13.3 U13.7 U13.8 U14.6 U14.7 U16.4 U17.29
copper on no net:
  other v2: 100.775,5.9 117.225,5.9 12.45,7.4 18.9,7.4 25.525,7.4 34.475,7.4 90.1,7.4 99.05,7.4 7.4,13.275 120.6,13.275 5.9,18.775 122.1,18.775 7.4,19.725 120.6,19.725 7.4,34.275 120.6,34.275 5.9,35.225 122.1,35.225 7.4,40.725 120.6,40.725 15.775,46.6 32.225,46.6 44.32,46.6 50.77,46.6 77.15,46.6 83.6,46.6 16.775,48.1 33.225,48.1 45.6,48.1 52.05,48.1 75.9,48.1 82.35,48.1
  other v3: 6,6.75 58,6.75 70,6.75 122,6.75 5.3,47.25 58,47.25 70,47.25 122,47.25

## Polygon pours and split planes (outlines as drawn)
GND on Top Layer "Amplifier_GND" (solid, pour order 49): 72.669,27.365 72.709,27.325 79.339,27.325 79.406,27.258 79.406,25.565 77.656,25.565 77.291,25.2 77.302,25.189 77.302,22.895 76.435,22.895 72.825,26.506 72.669,26.506
GND on Top Layer "Amplifier_GND" (solid, pour order 47): 65.129,34.671 65.73,34.671 66.059,35 66.059,35.5 67.025,35.5 67.22,35.305 67.22,34.514 71.076,34.514 72.439,35.877 72.439,36.939 71.771,37.606 71.771,38.744 71.015,39.5 70.8,39.5 69.877,38.577 69.877,35.973 68.723,35.973 68.6,36.096 68.6,38.6 69.2,38.6 70.1,39.5 70.1,41.089 70.078,41.111 61.611,41.111 61.417,40.917 61.417,39.129 60.463,38.175 59.5,38.175 59.5,37.154 60.826,37.154 61.838,36.143 64.973,36.143 64.973,34.827
GND on Top Layer "Amplifier_GND" (solid, pour order 41): 31,23.175 32.669,23.175 32.701,23.207 34.356,21.552 34.356,21.398 34.577,21.177 34.577,19.6 41.382,19.6 41.382,22.6 42.956,22.6 42.956,23.659 45.6,23.659 45.6,24.9 43.1,24.9 42.697,25.303 42.697,25.575 34.379,25.575 34.379,24.5 31.023,24.5 31,24.477
GND on Top Layer "Amplifier_GND" (solid, pour order 12): 88.1,24.573 88.19,24.663 88.416,24.663 88.416,25.091 92.571,25.173 95.498,28.1 96.959,28.1 99.335,26.821 100.5,26.821 100.5,21.4 88.798,21.4 86.762,23.437 86.803,24.264 88.1,24.265
GND on Top Layer "Amplifier_GND" (solid, pour order 45): 85.851,5.107 85.851,7.994 86.013,8.156 88.9,8.156 88.9,9.112 87.737,10.276 86.706,10.276 83.551,13.43 75.652,13.43 75.255,13.033 74.995,13.033 74.995,5.202 74.9,5.107 76.373,5.107 76.405,5.139 76.405,11.06 78.177,11.06 78.277,10.96 78.277,5.107
GND on Top Layer "Amplifier_GND" (solid, pour order 43): 47.751,5.225 47.751,8.112 47.913,8.274 50.8,8.274 50.8,9.231 49.637,10.394 48.606,10.394 45.451,13.549 37.552,13.549 37.155,13.151 36.895,13.151 36.895,5.321 36.8,5.225 38.273,5.225 38.305,5.257 38.305,11.179 40.077,11.179 40.177,11.079 40.177,5.225
GND on Top Layer "GND_L01_P000" (solid, pour order 0): 74.9,18.882 78.65,18.882 79.15,19.382 79.15,20.882 79.4,21.132 83.95,21.132 83.95,22.332 83.9,22.382 77.65,22.382 76.625,21.357 76.625,19.882 74.9,19.882
NetU8_MC2_22 on Top Layer "Amplifier_GND" (solid, pour order 8): 46.247,10.681 47.747,10.681 47.747,8.931 46.247,8.931
GND on Bottom Layer "Amplifier_GND" (solid, pour order 51): 78.327,25.2 76.925,25.2 76.881,25.244 76.881,26.402 75.603,26.402 75.601,26.4 75.601,23.893 79.748,23.893 79.657,23.983 79.657,27.932 79.496,28.094 80,28.094 80,29.386 79.986,29.4 78.347,29.4 78.129,29.182 78.129,28.094 78.327,28.094
GND on Bottom Layer "Amplifier_GND" (solid, pour order 40): 61.9,27.65 62.2,27.35 62.2,21.1 62.5,20.8 67.6,20.8 67.6,21.5 66,21.5 65.499,22.001 65.49,27.51 65.4,27.6 65.4,28.6 64.7,28.6 63.31,29.99 61.91,29.99 61.9,30
NetP13_2 on Bottom Layer "Amplifier_GND" (solid, pour order 32): 112.3,17.2 116,17.2 116,15.4 112.3,15.4
NetP11_2 on Bottom Layer "Amplifier_GND" (solid, pour order 28): 11.75,15.975 11.75,19.675 13.525,19.675 13.525,15.975
NetP15_2 on Bottom Layer "Amplifier_GND" (solid, pour order 26): 11.825,10.8 11.825,14.5 13.6,14.5 13.6,10.8
GND on GND "Amplifier_GND" (solid, pour order 36): 0,54 128,54 128,0 0,0
no net on GND "Amplifier_GND" (solid, pour order 34): 0,54
no net on Top Overlay "Amplifier_GND" (solid): 30,24.55
3V3 on VCC "Amplifier_GND" (solid, pour order 38): 0,54 128,54 128,0 0,0

## Keep-outs
GND:
  rectangle: 67.593,36.648 68.445,37.5
  rectangle: 91.6,21.442 92.53,22.282
  rectangle: 35.72,21.407 36.714,22.414
  rectangle: 60.5,39.166 61.5,40.299
  rectangle: 60.5,37.8 61.5,38.8

## Silkscreen, mask and mechanical layers (free items; w line width, h text height)
Top Overlay:
  lines w0.2: 28,14.499 28,35.79 54.752,35.79 54.752,14.499 28,14.499 ; 33,0.4 56.55,0.4 56.55,14 33,14 33,0.4 ; 56.191,31.714 56.191,43.3 73.7,43.3 73.7,31.714 56.191,31.714 ; 71.298,0.4 71.298,14 94.848,14 94.848,0.4 71.298,0.4 ; 101.925,10.4 101.925,18.1 124.429,18.1 124.429,10.4 101.925,10.4
  text "PHT1" at 53.5,52 h1
  text "PHT2" at 84,52 h1
  text "RX" at 113.75,49.5 h0.8 r90
  text "TX" at 115.5,49.5 h0.8 r90
  text "STAT" at 106.65,49.4 h0.8 r90
  text "RST" at 108.447,49.4 h0.8 r90
  text "RXCAN" at 110.25,49.4 h0.8 r90
  text "TXCAN" at 112.1,49.4 h0.8 r90
  text "SSM RST" at 98,48.832 h1
  text "LED PCB" at 21.5,44.328 h1
  text "PROG" at 20.1,39.765 h1
  text "UART" at 102.4,39.555 h1
  text "MISO" at 31,39.5 h0.8 r90
  text "MOSI" at 33.544,39.5 h0.8 r90
  text "SCK" at 36,39.5 h0.8 r90
  text "STAT" at 38.6,39.5 h0.8 r90
  text "RST" at 41.25,39.5 h0.8 r90
  text "LED_CLK" at 43.633,39.5 h0.8 r90
  text "SENS_CLK" at 46.25,39.5 h0.8 r90
  text "DO" at 48.75,39.5 h0.8 r90
  text "DI" at 51.25,39.5 h0.8 r90
  text "CLK" at 54,39.5 h0.8 r90
  text "CANH" at 75.6,39.4 h0.8 r90
  text "CANL" at 78.214,39.4 h0.8 r90
  text "DACA" at 88.25,39.4 h0.8 r90
  text "DACB" at 90.849,39.4 h0.8 r90
  text "RST" at 93.5,39.4 h0.8 r90
  text "GND" at 96,39.4 h0.8 r90
  text "GND" at 98.6,39.4 h0.8 r90
  text "PROG" at 111.5,39.4 h1
  text "TXCAN" at 80.75,38.899 h0.8 r90
  text "RXCAN" at 83.25,38.899 h0.8 r90
  text "THERMISTORS 6-10" at 117.5,34.275 h1 r270
  text "RST" at 29,34.2 h1
  text "OPTICAL MICRO" at 35.29,34.2 h1
  text "THM2" at 119,33 h0.8 r270
  text "ADC" at 64,32.245 h1
  text "TX" at 88.25,32 h0.8 r90
  text "RX" at 90.849,32 h0.8 r90
  text "5V" at 93.5,32 h0.8 r90
  text "PROG <-> RUN" at 109.847,31.9 h1 r270
  text "3V3" at 98.6,31.3 h0.8 r90
  text "SCK" at 80.776,31.25 h0.8 r90
  text "3V3" at 96,31.25 h0.8 r90
  text "MOSI" at 78.172,30.8 h0.8 r90
  text "MISO" at 75.5,30.7 h0.8 r90
  text "TX" at 15.25,30.5 h0.8
  text "STAT" at 83.25,30.5 h0.8 r90
  text "OPTICAL PCB" at 58.75,29.75 h1
  text "MISOA" at 85.8,29.75 h0.8 r90
  text "RX" at 15.25,28.775 h0.8
  text "RST" at 14.5,27 h0.8
  text "MISO" at 13.75,25.3 h0.8
  text "MOSI" at 13.75,23.5 h0.8
  text "THM3" at 9.75,23.4 h0.8 r90
  text "STAT" at 13.5,21.75 h0.8
  text "THM1" at 9.75,20.174 h0.8 r90
  text "THERMISTORS 1-5" at 11.75,20.174 h1 r90
  text "HEAT 1" at 15.775,18.1 h0.8
  text "CAN" at 112.054,16.681 h0.8
  text "HEAT 2" at 15.6,15 h0.8
  text "OBC PCB" at 105.927,8.6 h1
  text "HEAT 3" at 114.227,8.4 h0.8
  text "HERON MK II / PAY-SSM V3" at 20.75,3.2 h0.8
  text "MOTOR 2" at 41.4,1 h1
  text "MOTOR 1" at 80.2,1 h1
  text "!" at 10.5,0 h18 r359.93
Bottom Overlay:
  text "PHT_LED1" at 51.1,52.5 h1
  text "PHT_LED2" at 84.312,52.5 h1
  text "LED PCB" at 27.4,42.849 h1
  text "HEAT1" at 10.75,39.765 h1 r90
  text "HEAT3" at 117,35.25 h1 r270
  text "A2" at 65.25,19.4 h0.8
  text "A1" at 68.4,19.4 h0.8
  text "A0" at 71.305,19.4 h0.8
  text "HEAT2" at 10.75,19 h1 r90
  text "HEAT4" at 117,14.431 h1 r270
  text "MOTOR 1" at 97.75,10.8 h1
  text "MOTOR 2" at 33.25,10.547 h1
  text "HEAT5" at 18.25,0.5 h1
Mechanical 1:
  lines w0.254: 12.1,17.35 12.1,36.1 ; 12.5,17.75 0,17.75 0,36.5 12.5,36.5 ; 15.5,42 15.5,53.75 ; 16.3,42.2 16.55,42.45 44.05,42.45 44.3,42.7 ; 20.2,45.4 48.2,45.4 ; 43.5,42.5 43.5,54 ; 79.25,54 108.75,54 108.75,42 108.25,41.5 79.5,41.5 ; 79.35,41.95 79.35,53.95 ; 84.899,41.899 85.149,41.649 ; 87.9,10.8 111.15,10.8 ; 88,11 88,0 111.25,0 111.25,11 ; 95.1,18.6 107.6,18.6 ; 95.5,37.75 108,37.75 ; 99.3,19.3 99.3,38.05 ; 107.9,18.8 107.9,37.55 ; 115.4,18.55 115.4,37.3 ; 115.5,18.75 128,18.75 128,37.5 115.5,37.5
  text "MOTOR 1  / (BOTTOM COPPER)" at 81.2,56.5 h1.52
  text "HEATERS  / (TOP AND  / BOTTOM)" at 19.654,18.596 h1.52 r90
  text "SENSOR PCB / CONNECTOR FACES / RIGHT / (TOP COPPER)" at 93.3,9.5 h1.52
  text "MOTOR 2  / (BOTTOM COPPER)" at 97.3,4.7 h1.52
  text "INCOMING FROM SSM / (BOTTOM COPPER)" at 89.4,1.5 h1.52
  text "THERMISTORS / (TOP COPPER)" at 128.3,0 h1.52 r90
Route Tool Path:
  the board outline again, w0.2
Mechanical 13:
  lines w0.2: -0.25,39 127.392,39

## Text inside footprints (layer, text, board x,y; h text height)
P1: Top Overlay "6" at 117.364,37.057 h0.75; Top Overlay "5" at 117.364,34.517 h0.75; Top Overlay "2" at 108.22,37.057 h0.75; Top Overlay "1" at 108.728,34.517 h0.75
P17: Top Overlay "19" at 70.9,25.9 h0.75; Top Overlay "20" at 70.789,21.357 h0.75; Top Overlay "1" at 56.8,26.031 h0.75; Top Overlay "2" at 56.55,21.7 h0.75; Mechanical 13 "19" at 72.128,26.718 h1.27 r270; Mechanical 13 "20" at 72.2,22.4 h1.27 r180; Mechanical 13 "1" at 56.55,27 h1.27 r180; Mechanical 13 "2" at 57.142,22.552 h1.27
P19: Top Overlay "1" at 17.428,34.581 h0.75; Top Overlay "2" at 16.92,37.121 h0.75; Top Overlay "5" at 26.064,34.581 h0.75; Top Overlay "6" at 26.064,37.121 h0.75
P21: Top Overlay "2" at 73,36.6 h0.75; Top Overlay "1" at 73.15,34.8 h0.75; Top Overlay "19" at 99.604,34.581 h0.75; Top Overlay "20" at 99.604,37.121 h0.75